# EAGLE board microbot4x3mm (EAGLE 7.6.0)

Size 10.67 x 10.67 mm. Coordinates in mm from the lower left corner, seen from the top.
Outline: 0,0.51 0,10.16 arc-90 0.51,10.67 10.16,10.67 arc-90 10.67,10.16 10.67,0.51 arc-90 10.16,0 0.51,0 arc-90 0,0.51
Copper layers (1*16): Top 0.0356mm / dielectric 1.5011mm / Bottom 0.0356mm
Design rules "LaenPCBOrder *": minimum track width 6mil, minimum drill 13mil, track to track 6mil, track to pad 6mil, pad to pad 6mil, via to via 6mil, smd to smd 6mil, copper to edge 15mil, drill to drill 6mil, minimum pad ring 7mil, minimum via ring 7mil, stop-mask expansion 4mil, vias tented up to drill 30mil, thermal gap 10mil
Net classes: 0 default: width 0.203 mm, drill 0.381 mm, clearance 0.203 mm; 1 vcc: width 0.203 mm, drill 0.381 mm, clearance 0.203 mm; 2 gnd: width 0.203 mm, drill 0.381 mm, clearance 0.203 mm

## Footprints (pad centres in the part's own frame; a part is rotated, then mirrored left to right if it is on the bottom)
MOUNTINGHOLE_3.0_PLATEDTHIN = drill 3 pad 3.6: P$1 0,0
MOUNTINGHOLE_2.0_PLATED = drill 2.2 pad 3: P$1 0,0

## Placement (x,y rotation side)
U$1  MOUNTINGHOLE3.0THIN  [MOUNTINGHOLE_3.0_PLATEDTHIN]  8.38,8.38 0 top
U$2  MOUNTINGHOLE2.0  [MOUNTINGHOLE_2.0_PLATED]  5.33,2.29 0 top
U$3  MOUNTINGHOLE3.0THIN  [MOUNTINGHOLE_3.0_PLATEDTHIN]  2.29,2.29 0 top
U$4  MOUNTINGHOLE2.0  [MOUNTINGHOLE_2.0_PLATED]  5.33,8.38 0 top
U$5  MOUNTINGHOLE3.0THIN  [MOUNTINGHOLE_3.0_PLATEDTHIN]  5.33,5.33 0 top
U$6  MOUNTINGHOLE3.0THIN  [MOUNTINGHOLE_3.0_PLATEDTHIN]  2.29,8.38 0 top
U$7  MOUNTINGHOLE2.0  [MOUNTINGHOLE_2.0_PLATED]  2.29,5.33 0 top
U$8  MOUNTINGHOLE3.0THIN  [MOUNTINGHOLE_3.0_PLATEDTHIN]  8.38,2.29 0 top
U$10  MOUNTINGHOLE2.0  [MOUNTINGHOLE_2.0_PLATED]  8.38,5.33 0 top

## Library data of the parts
U$1-U$8 U$10 = microbuilder; BOM: EXCLUDE